# Altium PCB Wire Detector PCB.PcbDoc
Units mm, origin at the board's own origin, x right, y up, seen from the top; angles counter-clockwise.
Board outline 65.8 x 35.6 mm, 2 copper layers (Top Layer, Bottom Layer); 9 components, 7 nets, 26 pads, 0 vias.
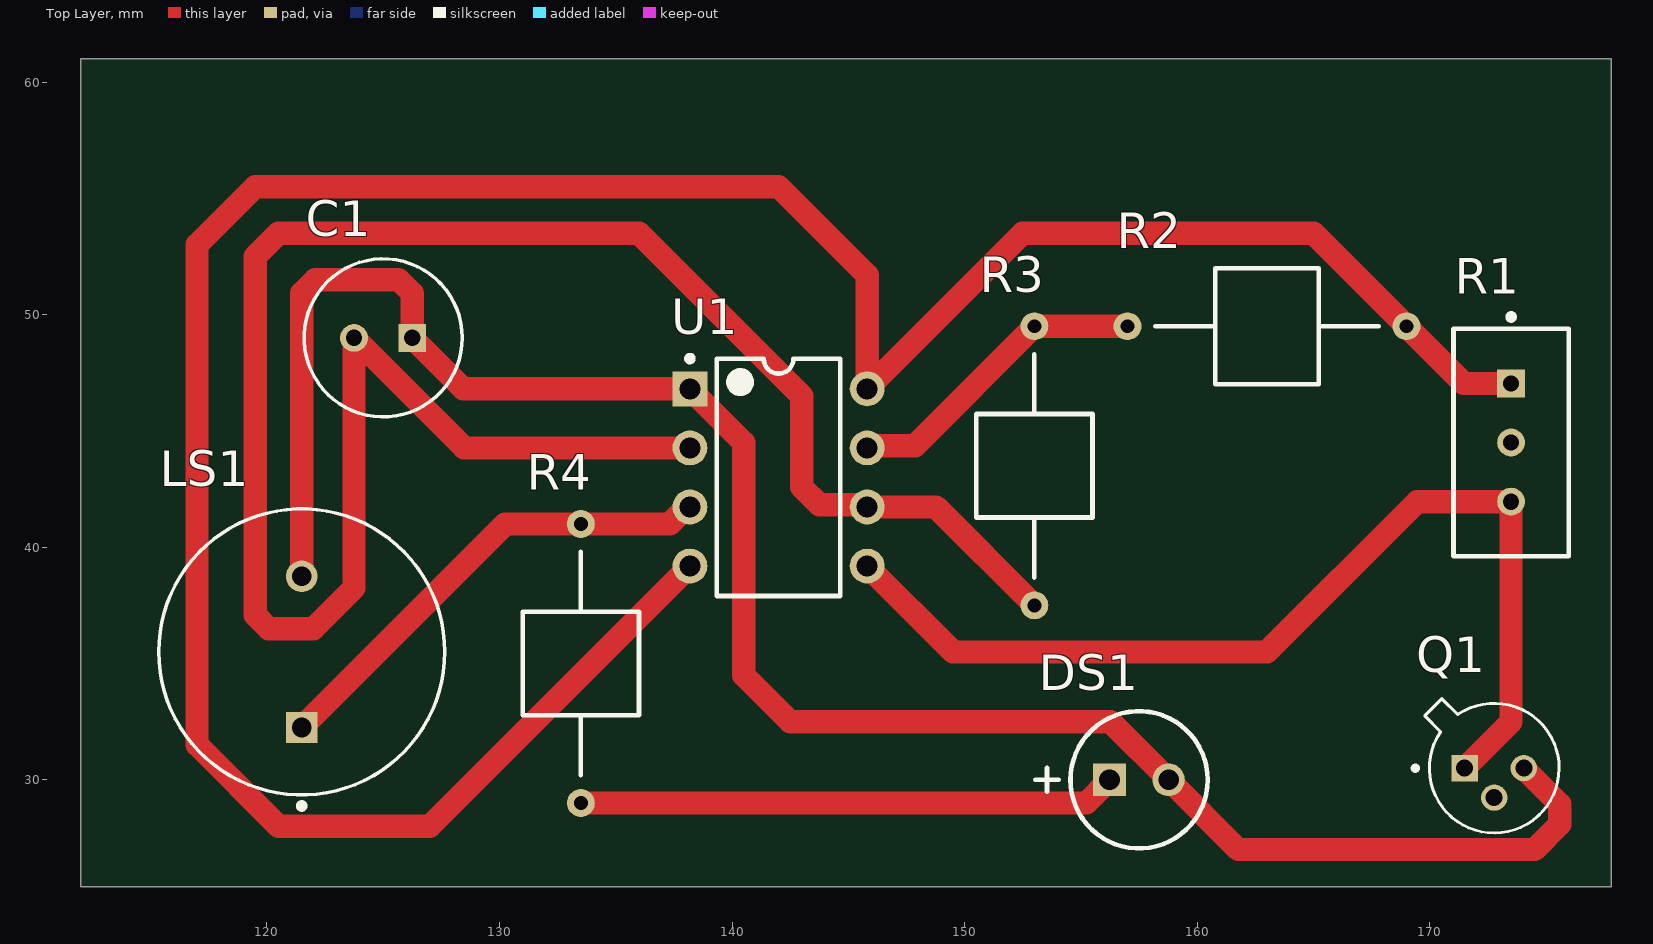
[diagram p0: Top Layer view]
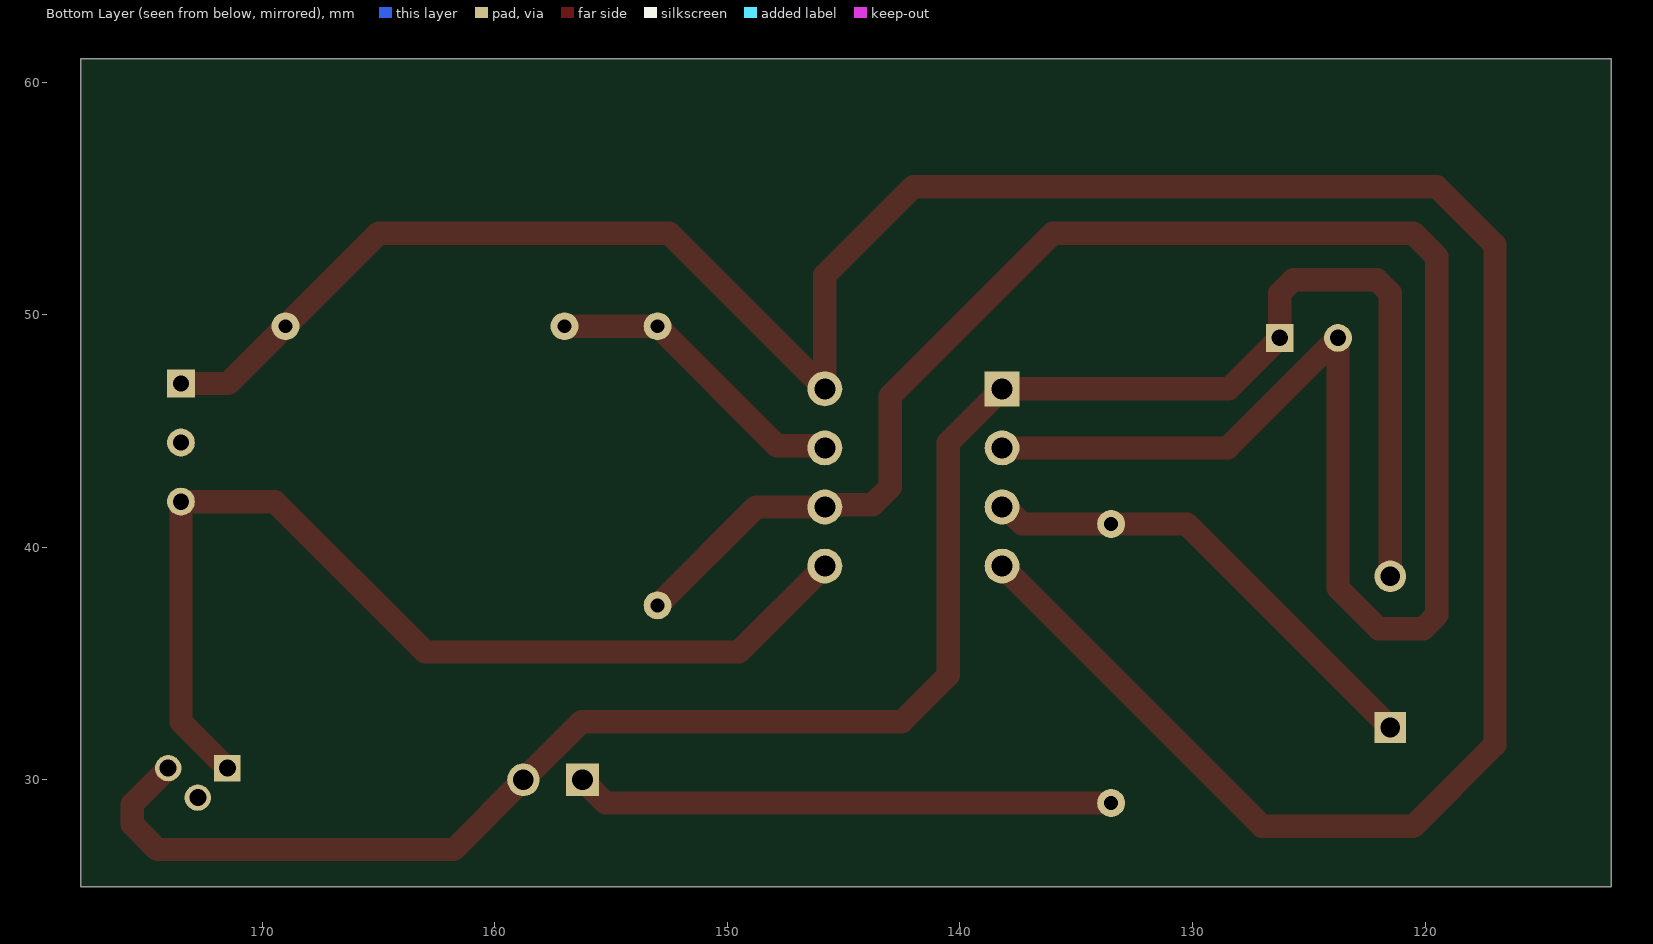
[diagram p1: Bottom Layer view, seen from below]
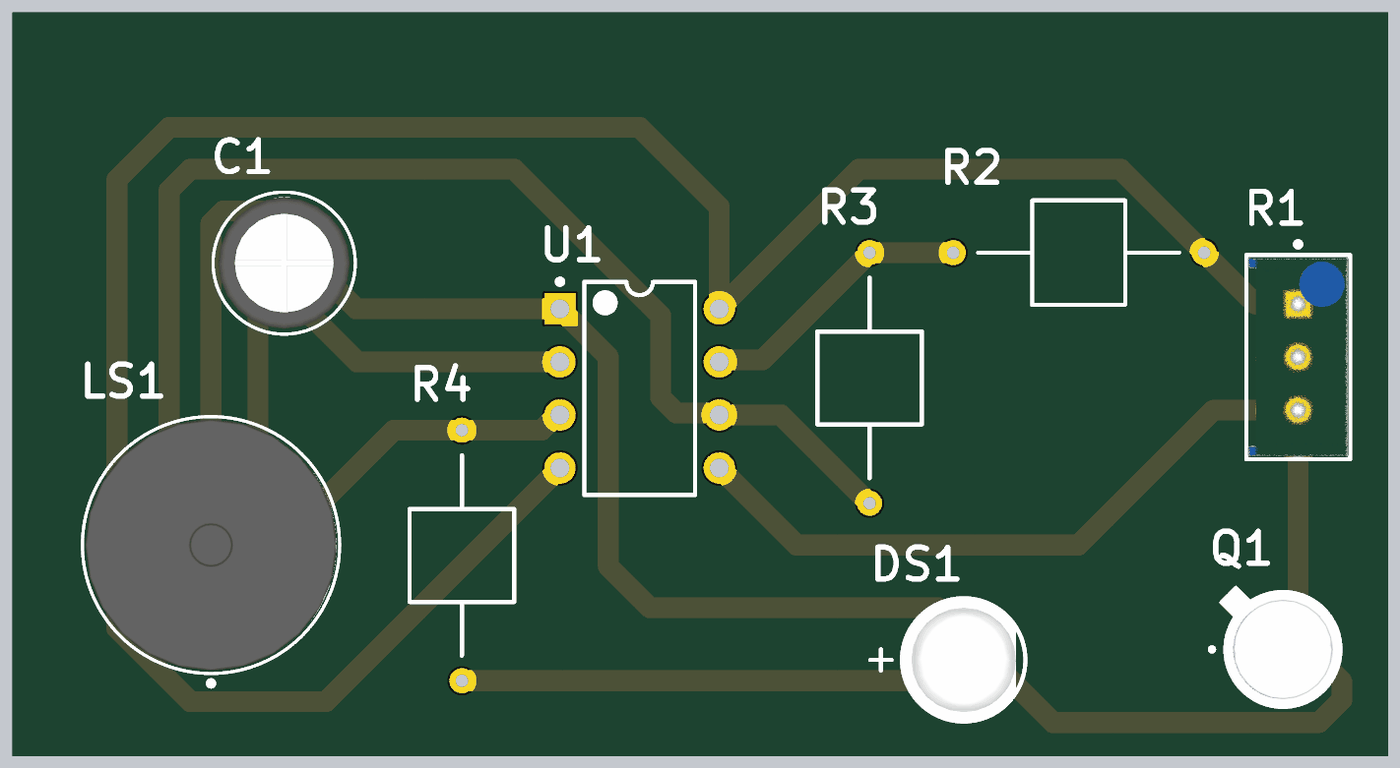
[diagram p2: 3D render of the assembled board from above, using the file's embedded part models]

## Layer stack, top to bottom
Top Solder: solder mask 0.0102, Solder Resist, Dk 3.5
Top Layer: signal copper 0.0356
Dielectric 1: dielectric 0.32, FR-4, Dk 4.8
Bottom Layer: signal copper 0.0356
Bottom Solder: solder mask 0.0102, Solder Resist, Dk 3.5

## Board outline
112,25.4 177.8,25.4 177.8,61 112,61

## Design rules (kind name [scope] priority, off if disabled: settings)
Clearance [All] p1: gap=0.254 ignorepadtopadclearanceinfootprint=FALSE except(0.3: Arc-Arc Arc-Track Track-Track)
PolygonConnect [All] p1: connectstyle=Relief reliefconductorwidth=0.254 reliefentries=4 polygonreliefangle="90 Angle" airgapwidth=0.254
RoutingVias [All] p1: holewidth=0.6 width=1 viastyle="Through Hole" minholewidth=0.4 minwidth=0.7 maxholewidth=0.711 maxwidth=1.27
SolderMaskExpansion [All] p1: expansion=0.102 istentingtop=FALSE
SupplyNets "Schematic Supply Nets_1" [InNet('GND')] p1: voltage=0.000
SupplyNets "Schematic Supply Nets" [InNet('9V')] p2: voltage=0.000
Width [All] p1: maxlimit=1 minlimit=0.1 preferedwidth=0.254
30 further rules are at their usual default settings.

## Components (designator, comment, footprint, x,y, rotation, side; value= is the part's Value field where it differs from the comment)
C1 "ECA1CEN470" FP-RAD-TH-D_6_3_0_5-L_11-MFG 125,49 r180 top
DS1 "WP7113SGD" KING-WP7113SGD_V 157.5,30 r0 top
LS1 "AT-1224-TWT-5V-2-R" FP-AT-1224-TWT-5V-2-R-MFG 121.5,35.5 r90 top
Q1 "КП103К" TO127P584H533-3 172.77,30.5 r0 top
R1 "3296W-1-103LF" FP-3296W-MFG 173.5,44.5 r180 top
R2 "2K" R 157,49.5 r0 top
R3 "10K" R 153,37.5 r90 top
R4 "1K" R 133.5,29 r90 top
U1 "NE555P" P0008A 142,43 r0 top

## Footprints (in the part's own frame and the unit in brackets; to place one, negate y for a bottom-side part, rotate by r counter-clockwise, add the part's x,y. Pads: shape width x height; smd on the part's side, far side on the other; paste and mask are expansions set on the pad)
FP-3296W-MFG [mm]
  rect 1.2x1.2 hole 0.7 paste-2539.97 mask+0: 1(0.005,-2.54)
  round 1.2 hole 0.7 paste-2539.97 mask+0: 2(0.005,0) 3(0.005,2.54)
  silkscreen extent -2.48,-5.52 2.48,4.89, body extent -2.58,-4.99 2.58,4.99, height 0.25
FP-AT-1224-TWT-5V-2-R-MFG [mm]
  rect 1.35x1.35 hole 0.85 paste-2539.97 mask+0: 1(-3.25,0)
  round 1.35 hole 0.85 paste-2539.97 mask+0: 2(3.25,0)
  silkscreen extent -6.75,-6.15 6.15,6.15, body extent -6.25,-6.25 6.25,6.25, height 0.25
FP-RAD-TH-D_6_3_0_5-L_11-MFG [mm]
  rect 1.2x1.2 hole 0.7 paste-2539.97 mask+0: 1(-1.25,0)
  round 1.2 hole 0.7 paste-2539.97 mask+0: 2(1.25,0)
  silkscreen extent -3.4,-3.4 3.4,3.4, body extent -3.5,-3.5 3.5,3.5, height 0.25
KING-WP7113SGD_V [mm] "THD, 2-Leads, Dia 5.9mm, Body Length 8.6mm"
  rect 1.4x1.4 hole 0.889: 1(-1.27,0)
  round 1.4 hole 0.889: 2(1.27,0)
  silkscreen extent -4.47,-2.95 2.95,2.95, body extent -2.95,-2.95 2.5,2.95, height 15.5
P0008A [mm] "DIP, 8-Leads, Body 10.15x6.6mm, Pitch 2.54mm"
  rect 1.5x1.5 hole 0.9: 1(-3.81,3.81)
  round 1.5 hole 0.9: 2(-3.81,1.27) 3(-3.81,-1.27) 4(-3.81,-3.81) 5(3.81,-3.81) 6(3.81,-1.27) 7(3.81,1.27) 8(3.81,3.81)
  silkscreen extent -3.93,-5.1 2.65,5.23, body extent -3.95,-5.07 3.95,5.07, height 5.08
R [mm]
  round 1.2 hole 0.6: 1(0,0) 2(12,0)
  silkscreen extent 1.2,-2.5 10.8,2.5
TO127P584H533-3 [mm]
  rect 1.13x1.13 / inner round 1.13 / far side rect 1.13x1.13 hole 0.73: 1(-1.27,0)
  round 1.13 hole 0.73: 2(0,-1.27) 3(1.27,0)
  silkscreen extent -3.49,-2.79 2.79,2.99, body extent -2.94,-2.79 2.79,2.94, height 7.36

## Part data
C1: library part CMP-05427-001931-1, "Aluminum Electrolytic Capacitors (Radial Lead Type) 47uF ±20% 16V", Capacitance=47uF, Case/Package=Radial, Max Operating Temperature=105°C, Min Operating Temperature=-40°C, Package Quantity=200, Ripple Current=100mA, Tolerance=20%, Voltage Rating (DC)=16V, Lead Pitch=2.5mm, Lead/Base Style=Straight, Mount="Through Hole", Packaging="Ammo Pack", RoHS Compliant=Yes, Series=GA, Termination=Radial
DS1: library part CMP-2100-03698-1, "LED Green, 62.5 mW, 25 mA, -40 to 85 degC, 2-Pin THD, RoHS, Bulk", Case/Package=Radial, Colour=Green, Forward Voltage=2.2V, Manufacturer=Kingbright, Package Description="2-Pin Through Hole Device, Dia 5.9 mm, Body Length 8.6 mm", Package Quantity=1000, Test Current=20mA, Datasheet URL=http://www.kingbrightusa.com/images/catalog/SPEC/WP7113SGD.pdf, Datasheet Version="Rev. 6B, 01/2015", Dominant Wavelength=568nm, Height=8.6mm, Illumination Colour=Green, Lead Free=LeadFree, Lens Style=Tinted, Luminous Intensity=40mcd, Package Reference=WP7113SGD, Packaging=Bulk, RoHSCompliant=true, Viewing Angle=30degrees, Wavelength=568nm
LS1: library part CMP-231722-000001-1, "BUZZER MAGNETIC 5V 12MM TH", Frequency=2.4kHz, Max Operating Temperature=70°C, Max Supply Current=40mA, Min Operating Temperature=-30°C, Voltage Rating=5V, Contact Plating=Tin, Diameter=12mm, Height=9mm, Mount="Through Hole", Operating Supply Current=40mA, Packaging=Tray, Sensing Method=Magnetic, Series=AT, Termination="PC Pins"
Q1: library part 2N2608, "JFET P-Channel 10V 0.038W Through Hole TO-18", Package="TO-18 Motorola", Check_prices=https://www.snapeda.com/parts/2N2608/Motorola/view-part/?ref=eda, MF=Motorola, MP=2N2608, SnapEDA_Link=https://www.snapeda.com/parts/2N2608/Motorola/view-part/?ref=snap
R1: library part CMP-1747-00001-8, "TRIMMER 10K OHM 0.5W PC PIN TOP", Color=Blue, Insulation Resistance=1GR, Max Operating Temperature=125°C, Max Power Dissipation=500mW, Min Operating Temperature=-55°C, Package Quantity=50, Resistance=10kR, Resistance Tolerance=10%, Resistor Type=Cermet, Temperature Coefficient=100ppm/°C, Contact Plating=Tin, Depth=4.83mm, Height=11.55mm, Lead Free="Lead Free", Length=9.53mm, Military Standard=Not, Mount="Through Hole", Number of Turns=25, Packaging=Rail/Tube, Power Rating=500mW, Radiation Hardening=No, Reach SVHC Compliant=Yes, RoHS Compliant=Yes, Series=3296, Taper=Linear, Technology=CERMET, Termination=Pin, Tolerance=10%, Weight=0.03oz, Width=9.53mm
R2 R3 R4: library part "R 0,250W", "1 kOhms ±1% 0.25W, 1/4W Through Hole Resistor Axial Automotive AEC-Q200 Metal Film", MPN=MFS1/4CC1001F, Voltage=250V, ComponentLink1Description=Datasheet, ComponentLink1URL=https://www.koaspeer.com/pdfs/MF-MFS-RK.pdf, ComponentLink2Description="Supplier #1", ComponentLink2URL=https://www.digikey.pl/en/products/detail/koa-speer-electronics-inc/MFS1-4CC1001F/21681477, SPN#1=2019-MFS1/4CC1001F-ND, Supplier #1=DigiKey
U1: library part CMP-2000-04954-1, "Precision Timer, 4.5 to 16 V, 0 to 70 degC, 8-Pin DIP, Pb-Free, Tube", Manufacturer=TexasInstruments, Maximum High Level Output Current=-200mA, Maximum Low Level Output Current=200mA, Operating Supply Voltage=5, Package=8PDIP, Package Description="8-Pin Double In-line Package, Body 9.59 x 6.35 mm, Pitch 2.54 mm", Package Reference=P8, Category=Timer, Datasheet URL=http://www.ti.com/general/docs/lit/getliterature.tsp?genericPartNumber=NE555&fileType=pdf, Datasheet Version="Rev. I, 09/2014", Manufacturer URL=http://www.ti.com/, Number of Internal Timers=1, Package URL=http://www.ti.com/lit/ml/mpdi001b/mpdi001b.pdf, Packaging=Rail/Tube, Rad Hard=No, Type=Standard

## Nets (pads, with @x,y where several pads share a name; then routed paths per layer and width w, separated by ;. In a path a pad name is that pad's centre, name@x,y a point inside that pad or via, vN(x,y) a via of type N, cw(c..) or ccw(c..) an arc to the next point about the centre after c; other vN are vias at no path point)
9V: R1.1 R2.2 U1.4 U1.8 | length 118.2
  Top Layer w1: U1.4 127,28 120.5,28 117,31.5 117,53 119.5,55.5 142,55.5 145.81,51.69 U1.8 152.5,53.5 165,53.5 R2.2 171.46,47.04 R1.1
GND: C1.1 DS1.2 LS1.2 Q1.3 U1.1 | length 87.1
  Top Layer w1: LS1.2 121.5,50.914 122.086,51.5 125.664,51.5 126.25,50.914 C1.1 128.44,46.81 U1.1 140.5,44.5 140.5,34.5 142.5,32.5 156.27,32.5 DS1.2 161.77,27 174.5,27 175.586,28.086 175.586,28.954 Q1.3
NetC1_2: C1.2 R3.1 U1.2 U1.6 | length 90.8
  Top Layer w1: U1.2@138.286,44.174 U1.2 128.48,44.27 C1.2 123.75,38.25 122,36.5 120.086,36.5 119.5,37.086 119.5,52.5 120.5,53.5 136,53.5 143,46.5 143,42.586 143.76,41.826 145.714,41.826 U1.6 148.77,41.73 R3.1
NetDS1_1: DS1.1 R4.1 | length 23.1
  Top Layer w1: R4.1 155.23,29 DS1.1
NetLS1_1: LS1.1 R4.2 U1.3 | length 20.6
  Top Layer w1: LS1.1 130.25,41 R4.2 137.325,41 138.055,41.73 U1.3
NetQ1_1: Q1.1 R1.3 U1.5 | length 44.2
  Top Layer w1: U1.5 149.5,35.5 163,35.5 169.46,41.96 R1.3 173.495,32.495 Q1.1
NetR2_1: R2.1 R3.2 U1.7 | length 13.4
  Top Layer w1: U1.7 145.906,44.366 147.866,44.366 R3.2 R2.1
pads on no net: Q1.2 R1.2